# Altium PCB PWR_PCB_1.PcbDoc
Units mm, origin at the board's own origin, x right, y up, seen from the top; angles counter-clockwise.
Board outline 100 x 100 mm, 2 copper layers (Top Layer, Bottom Layer); 23 components, 8 nets, 46 pads, 0 vias.
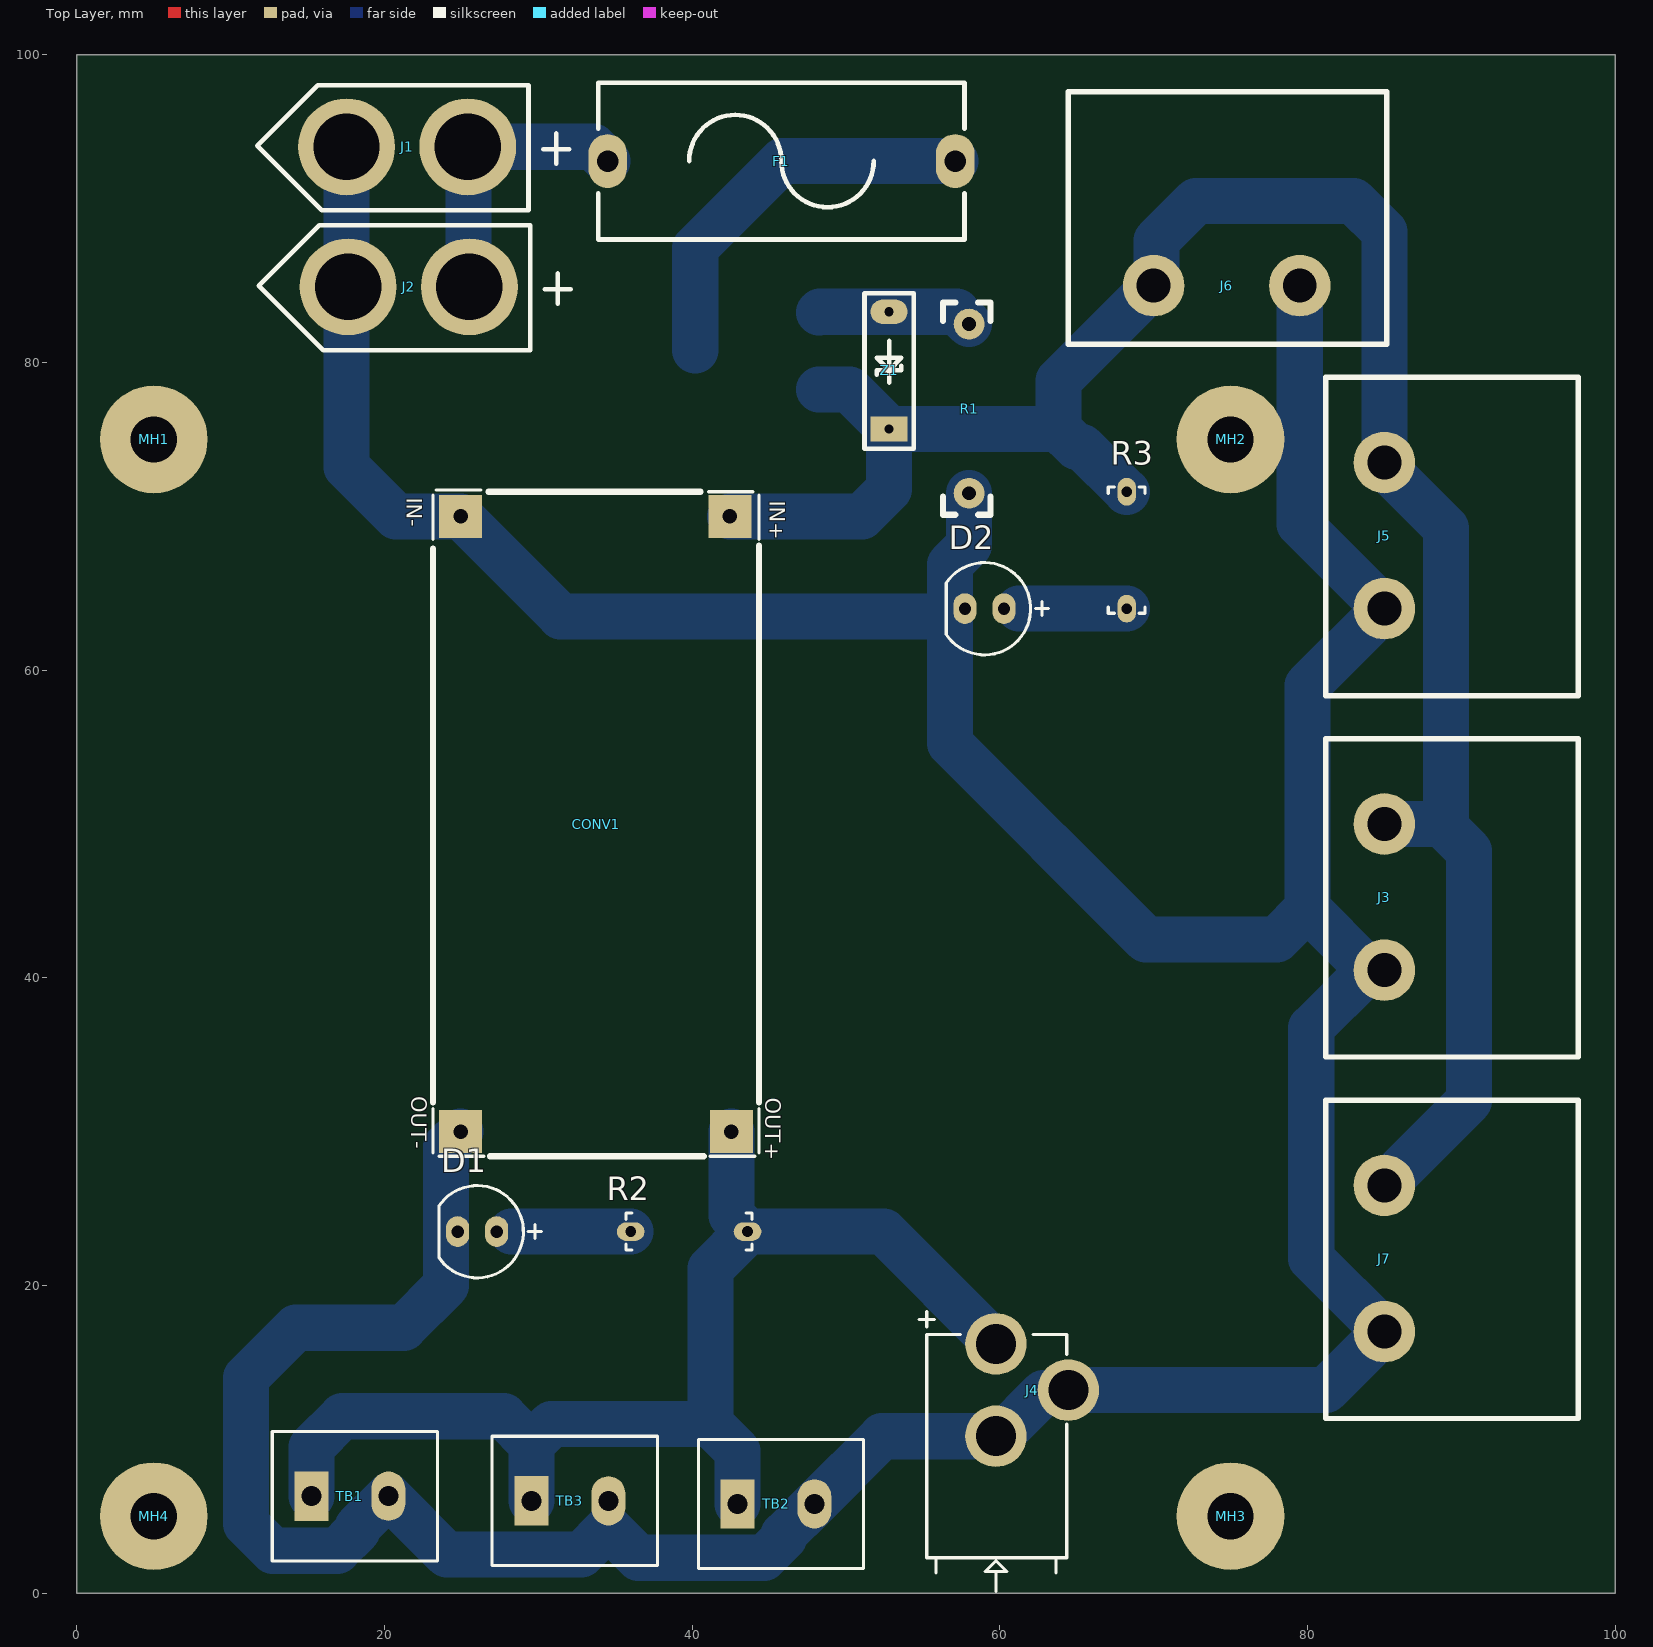
[diagram p0: Top Layer view]
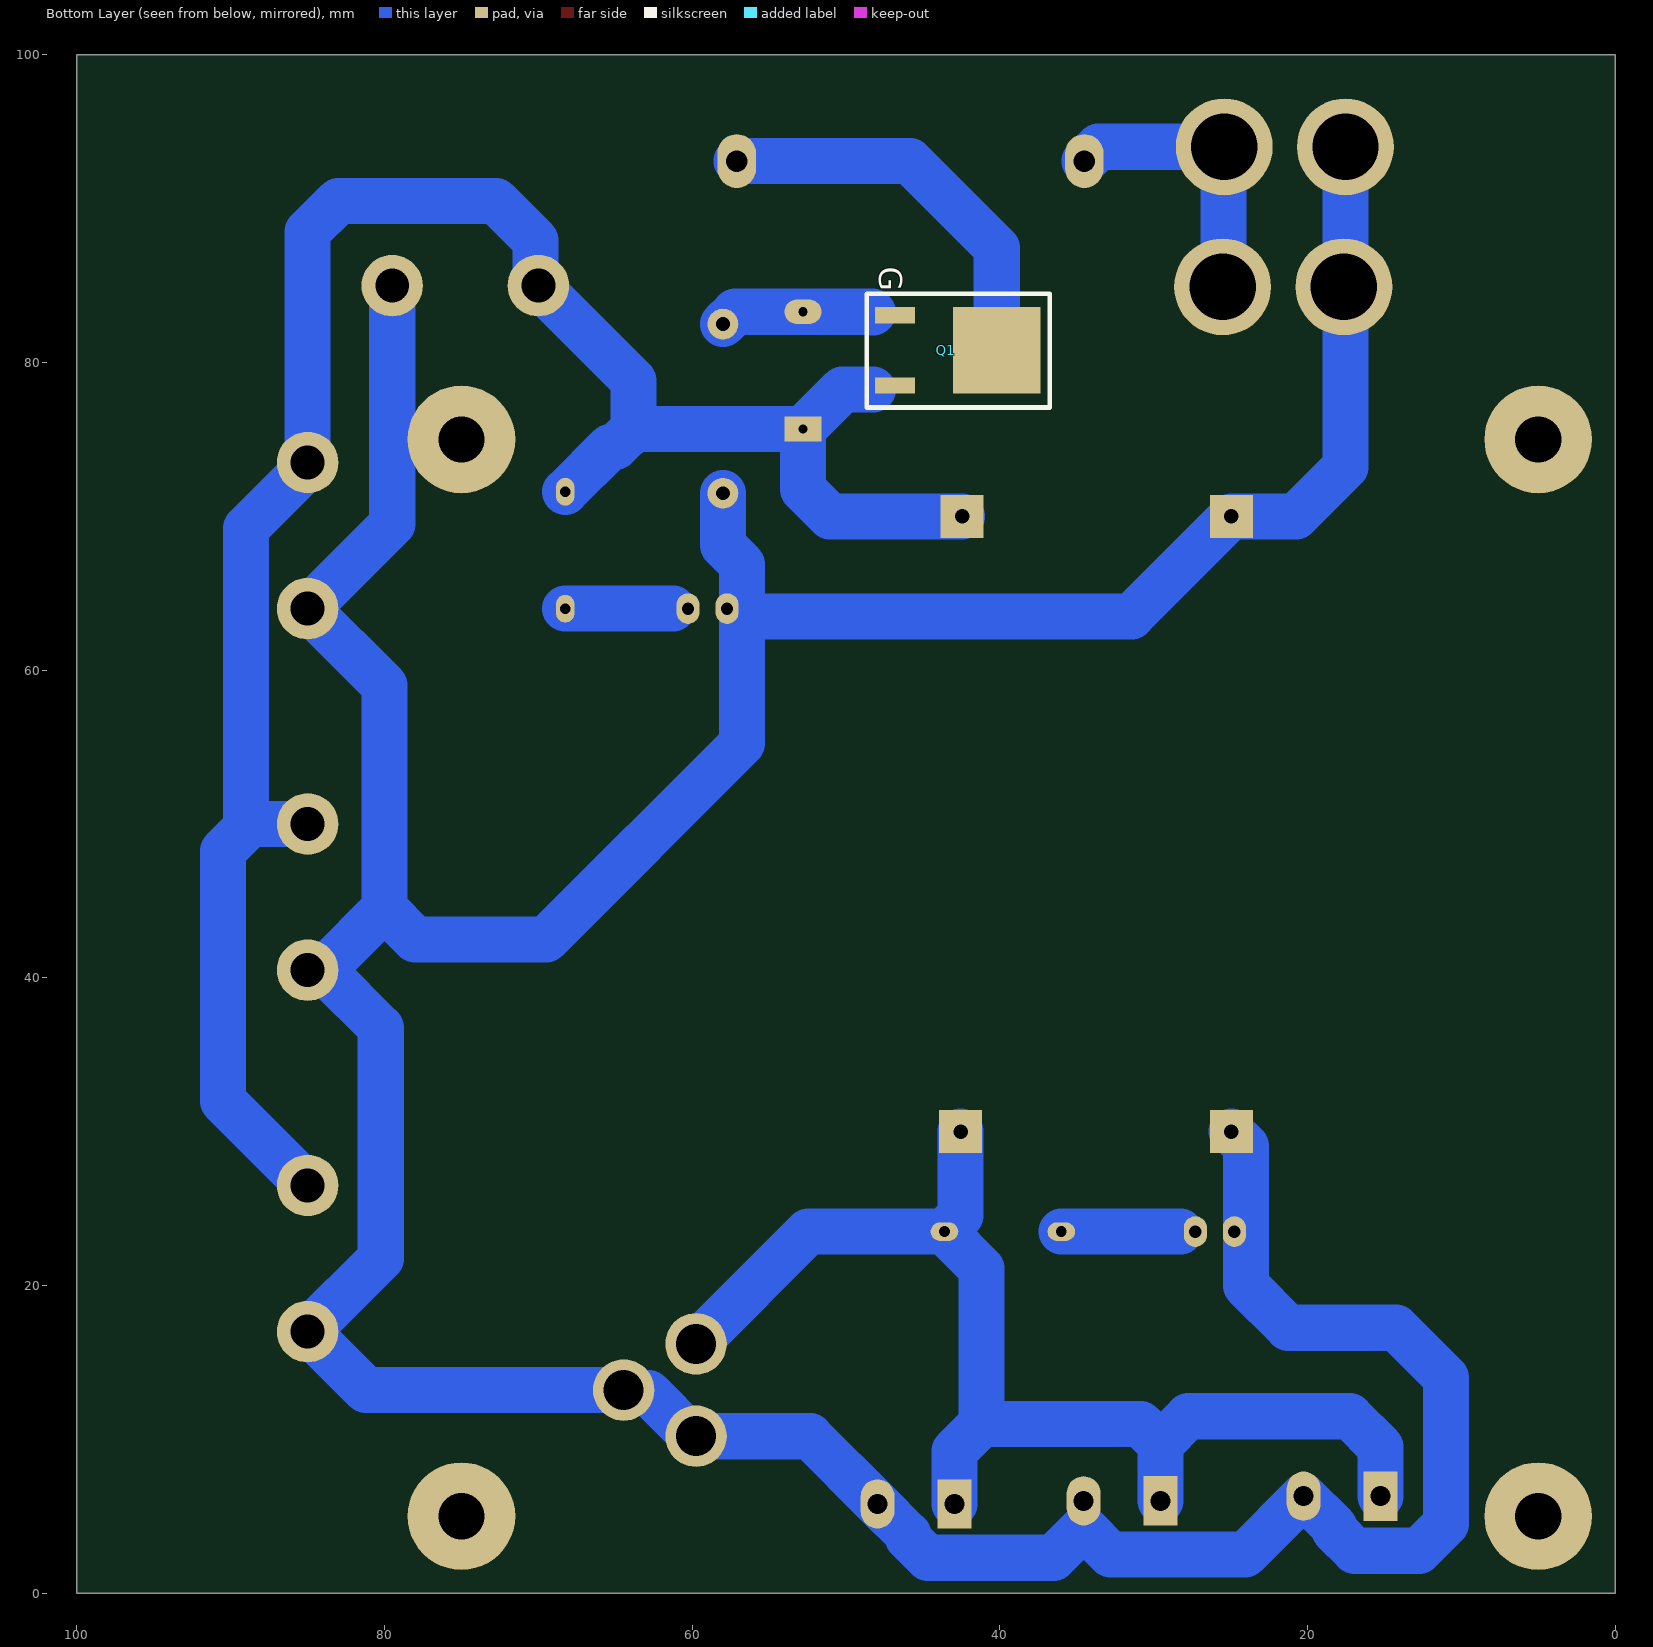
[diagram p1: Bottom Layer view, seen from below]
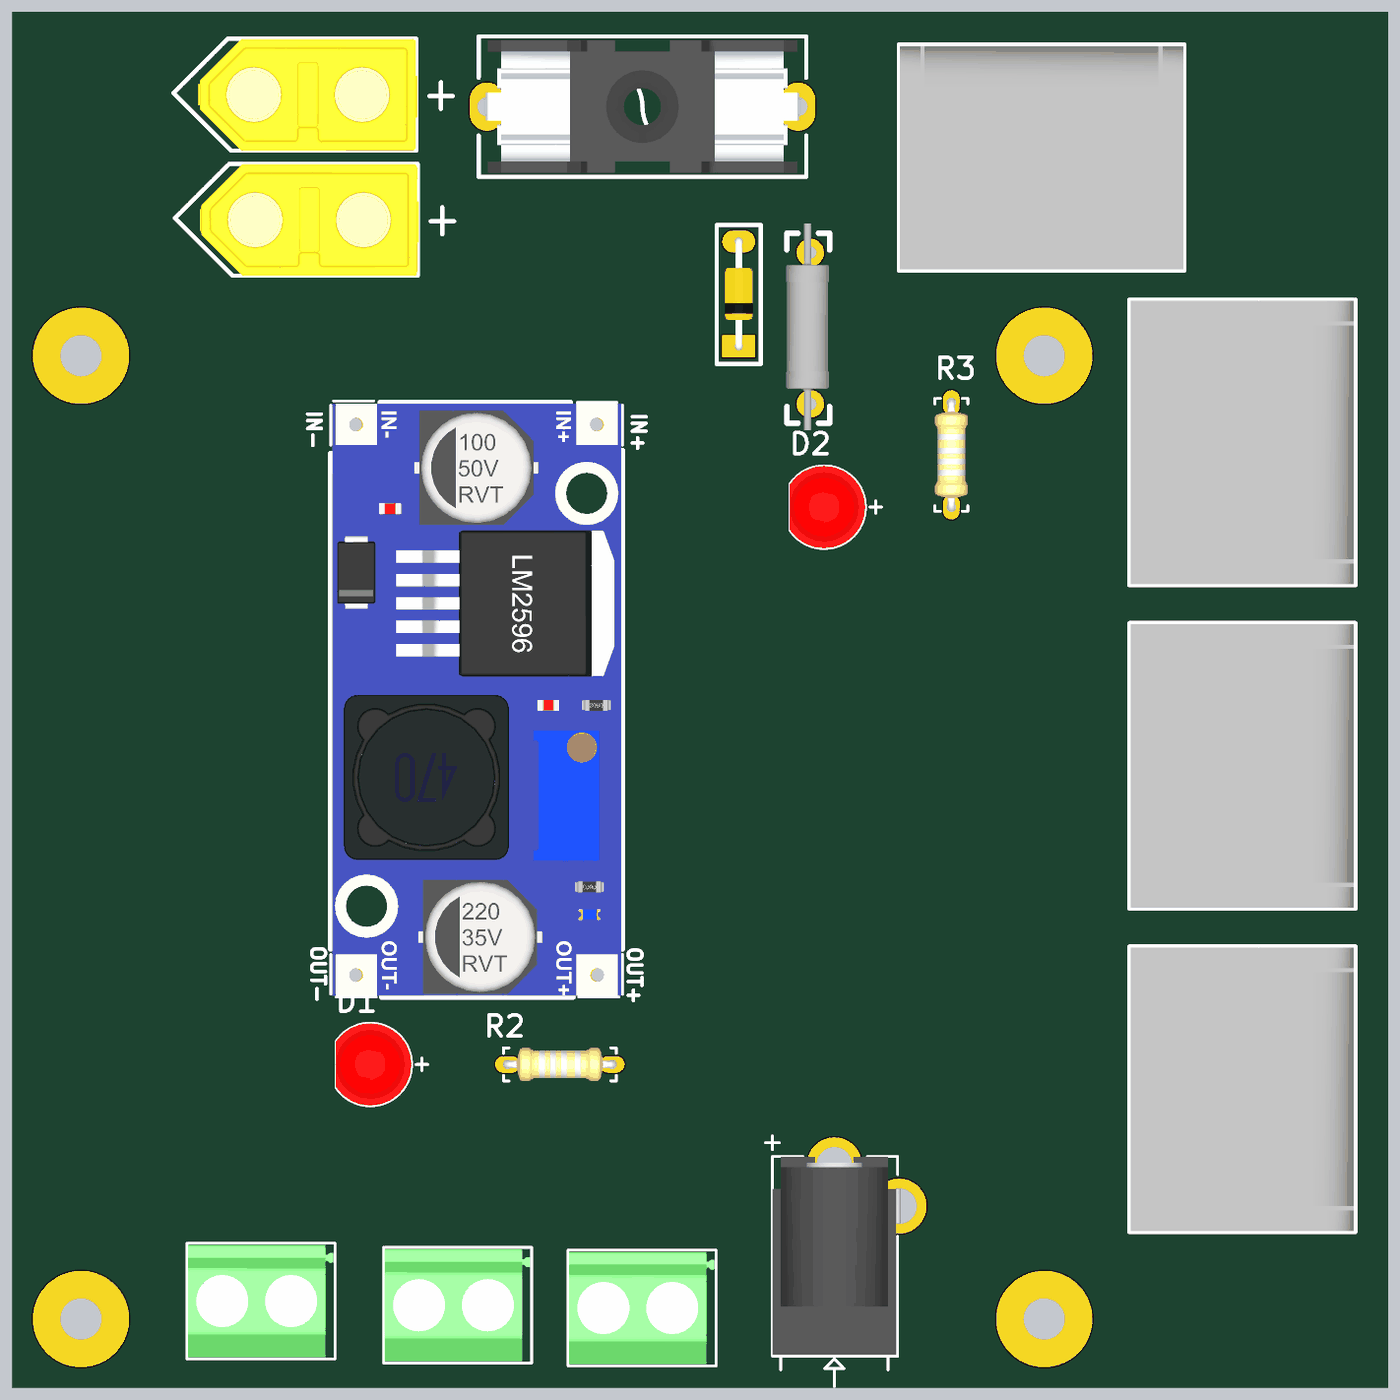
[diagram p2: 3D render of the assembled board from above, using the file's embedded part models]

## Layer stack, top to bottom
Top Solder: solder mask 0.0102, Solder Resist, Dk 3.5
Top Layer: signal copper 0.0356
Dielectric 1: dielectric 0.32, FR-4, Dk 4.8
Bottom Layer: signal copper 0.0356
Bottom Solder: solder mask 0.0102, Solder Resist, Dk 3.5

## Board outline
0,0 100,0 100,100 0,100

## Design rules (kind name [scope] priority, off if disabled: settings)
Clearance [All] p1: gap=0.5 ignorepadtopadclearanceinfootprint=FALSE
PolygonConnect [All] p1: connectstyle=Relief reliefconductorwidth=0.254 reliefentries=4 polygonreliefangle="90 Angle" airgapwidth=0.254
RoutingVias [All] p1: holewidth=0.711 width=1.27 viastyle="Through Hole" minholewidth=0.711 minwidth=1.27 maxholewidth=0.711 maxwidth=1.27
SolderMaskExpansion [All] p1: expansion=0.102 istentingtop=FALSE
Width [All] p1: maxlimit=4 minlimit=0.6 preferedwidth=1
30 further rules are at their usual default settings.

## Components (designator, comment, footprint, x,y, rotation, side; value= is the part's Value field where it differs from the comment)
CONV1 "LM2596  DC-DC Step Down" DC_STP_DWN 33.75,50 r270 top
D1 "Red" LED_TH_2.54mm 26.02,23.5 r180 top
D2 "Red" LED_TH_2.54mm 59,64 r180 top
F1 "Fuse Holder T5x20" FUSE 45.8,93.1 r0 top
J1 "XT-60" XT-60_FEM 21.5,94.1 r90 top
J2 "XT-60" XT-60_FEM 21.6,85 r90 top
J3 "Barrier TRM 1x2 9.5mm" BARRIER_9.5MM 85,50 r270 top
J4 "Barrel Power Jack" pwr_Jack 59.75,16.2 r180 top
J5 "Barrier TRM 1x2 9.5mm" BARRIER_9.5MM 85,73.5 r270 top
J6 "Barrier TRM 1x2 9.5mm" BARRIER_9.5MM 70,85 r0 top
J7 "Barrier TRM 1x2 9.5mm" BARRIER_9.5MM 85,26.5 r270 top
MH1 "MH_7.4MMC_3.2MMD" MH_7.4MMC_3.2MMD 5,75 r0 top
MH2 "MH_7.4MMC_3.2MMD" MH_7.4MMC_3.2MMD 75,75 r0 top
MH3 "MH_7.4MMC_3.2MMD" MH_7.4MMC_3.2MMD 75,5 r0 top
MH4 "MH_7.4MMC_3.2MMD" MH_7.4MMC_3.2MMD 5,5 r0 top
Q1 "AOD403" DPAK 46.825,83.075 r270 bottom
R1 "TH CFR-50 Resis" R_THT_CFR-50 58,77 r90 top
R2 "1k" R_THT_CFR-25 36,23.5 r0 top
R3 "1k" R_THT_CFR-25 68.25,64 r90 top
TB1 "TERM 1x2 5mm" TERMINAL_5MM 17.75,6.3 r90 top
TB2 "TERM 1x2 5mm" TERMINAL_5MM 45.45,5.8 r90 top
TB3 "TERM 1x2 5mm" TERMINAL_5MM 32.05,6 r90 top
Z1 "BZX55C9V1" DO-35 52.8,83.3 r270 top

## Footprints (in the part's own frame and the unit in brackets; to place one, negate y for a bottom-side part, rotate by r counter-clockwise, add the part's x,y. Pads: shape width x height; smd on the part's side, far side on the other; paste and mask are expansions set on the pad)
BARRIER_9.5MM [mm]
  round 4 hole 2.2: 1(0,0) 2(9.5,0)
  silkscreen extent -5.55,-3.8 15.15,12.6, body extent -5.5,-3.73 15.1,12.47, height 20.61
DC_STP_DWN [mm]
  rect 2.8x2.8 hole 0.95: 1(-20,8.7) 2(-20,-8.8) 3(20,8.8) 4(20,-8.8)
  silkscreen extent -21.72,-10.6 21.6,10.6, body extent -21.5,-10.5 21.5,10.5, height 13.16
DO-35 [mm]
  oval 1.6x2.4 hole 0.6: A(0,0)
  rect 1.6x2.4 hole 0.6: K(7.62,0)
  silkscreen extent -1.2,-1.6 8.9,1.6, body extent -0.26,-1 7.86,1.01, height 2.01
DPAK [mm]
  rect 5.632x5.7 smd: D(2.275,6.625)
  rect 1.06x2.6 smd: G(0,0) S(4.572,0)
  silkscreen extent -1.4,-1.83 6,10.07, body extent -0.97,-0.5 5.53,8.2, height 2.3
FUSE [mm]
  oval 2.5x3.5 hole 1.4: 1(-11.3,0) 2(11.3,0)
  silkscreen extent -11.9,-5.1 11.9,5.1, body extent -11.55,-4.8 11.55,4.8, height 11.5
LED_TH_2.54mm [mm]
  oval 1.5x2 hole 0.8: 1(-1.27,0) 2(1.27,0)
  silkscreen extent -4.17,-2.99 2.49,3.01, body extent -3,-3 2.5,3, height 8.96
MH_7.4MMC_3.2MMD [mm]
  round 7 hole 3: 1(0,0)
pwr_Jack [mm]
  round 4 hole 2.6: 1(0,0) 2(-4.7,3) 3(0,6)
  silkscreen extent -4.6,-2.1 5,16.1, body extent -4.8,-0.6 4.5,13.8, height 11.01
R_THT_CFR-25 [mm]
  oval 1.8x1.2 hole 0.7: 1(0,0) 2(7.6,0)
  silkscreen extent -0.3,-1.2 7.9,1.2, body extent -0.28,-1.2 7.89,1.2, height 1.9
R_THT_CFR-50 [mm]
  round 2 hole 0.9: 1(-5.5,0) 2(5.5,0)
  silkscreen extent -6.9,-1.4 6.9,1.7, body extent -7.4,-1.35 7.6,1.75, height 3.05
TERMINAL_5MM [mm]
  rect 3.2x2.2 hole 1.3: 1(0,2.5)
  oval 3.2x2.2 hole 1.3: 2(0,-2.5)
  silkscreen extent -4.2,-5.7 4.2,5.05, body extent -4.08,-5.58 4.07,4.98, height 10.01
XT-60_FEM [mm]
  round 6.3 hole 4.3: 1(-0.076,-3.912) 2(-0.076,3.962)
  silkscreen extent -4.19,-10.52 3.94,9.78, body extent -4.2,-7.96 3.93,7.98, height 15.39

## Part data
CONV1: library part "Buck Conv.", "Conv DC-DC 4.5V to 40V Inv/Step Down Single-Out 1.2V to 37V 3A 6-Pin(5+Tab) TO-263 Tube", Case/Package=TO-263, Manufacturer 1="Texas Instruments", Manufacturer Part Number 1=LM2596S-ADJ/NOPB, Max Input Voltage=40V, Max Operating Temperature=125°C, Max Output Current=3A, Max Output Voltage=37V, Min Input Voltage=4.5V, Min Operating Temperature=-40°C, Min Output Voltage=1.2V, Quiescent Current=5mA, Supplier Part Number 1=LM2596S-ADJ/NOPB-ND, Switching Frequency=173kHz, ComponentLink1Description=https://datasheet.ciiva.com/27056/2051160-27056491.pdf?src-supplier=Jameco, ComponentLink1URL=https://datasheet.ciiva.com/27056/2051160-27056491.pdf?src-supplier=Jameco, ComponentLink2Description=https://datasheet.ciiva.com/15112/getdatasheetpartid-55559-15112636.pdf?src-supplier=Verical, ComponentLink2URL=https://datasheet.ciiva.com/15112/getdatasheetpartid-55559-15112636.pdf?src-supplier=Verical, ComponentLink3Description=https://datasheet.ciiva.com/41457/001013814-da-01-en-ic-reg-buc-lm2596s-adj-nopb-to-263-5-tid-41457756.pdf?src-supplier=Conrad, ComponentLink3URL=https://datasheet.ciiva.com/41457/001013814-da-01-en-ic-reg-buc-lm2596s-adj-nopb-to-263-5-tid-41457756.pdf?src-supplier=Conrad, ComponentLink4Description=https://datasheet.ciiva.com/6596/lm2596-6596342.pdf?src-supplier=Digi-Key, ComponentLink4URL=https://datasheet.ciiva.com/6596/lm2596-6596342.pdf?src-supplier=Digi-Key, ComponentLink5Description=https://datasheet.ciiva.com/22669/1874590-22669464.pdf?src-supplier=Element14, ComponentLink5URL=https://datasheet.ciiva.com/22669/1874590-22669464.pdf?src-supplier=Element14, ComponentLink6Description=https://datasheet.ciiva.com/14150/jqlm2596x-xx-e-14150653.pdf?src-supplier=Distrelec, ComponentLink6URL=https://datasheet.ciiva.com/14150/jqlm2596x-xx-e-14150653.pdf?src-supplier=Distrelec, ComponentLink7Description=https://octopart.com/click/track?ai=10049&ct=datasheets&sig=08a4c86&at=physicalpart&sid=370&ppid=24812941&hlid=29972682&src-supplier=TI+store, ComponentLink7URL=https://octopart.com/click/track?ai=10049&ct=datasheets&sig=08a4c86&at=physicalpart&sid=370&ppid=24812941&hlid=29972682&src-supplier=TI+store, ComponentLink8Description=http://datasheet.octopart.com/LM2596S-ADJ-NOPB-Texas-Instruments-datasheet-34438175.pdf?src-supplier=TME, ComponentLink8URL=http://datasheet.octopart.com/LM2596S-ADJ-NOPB-Texas-Instruments-datasheet-34438175.pdf?src-supplier=TME, ComponentLink9Description=http://datasheet.octopart.com/LM2596S-ADJ/NOPB-Texas-Instruments-datasheet-10621667.pdf?src-supplier=Verical, ComponentLink9URL=http://datasheet.octopart.com/LM2596S-ADJ/NOPB-Texas-Instruments-datasheet-10621667.pdf?src-supplier=Verical, ComponentLink10Description=http://datasheet.octopart.com/LM2596S-ADJ-NOPB-Texas-Instruments-datasheet-14775467.pdf?src-supplier=TI+store, ComponentLink10URL=http://datasheet.octopart.com/LM2596S-ADJ-NOPB-Texas-Instruments-datasheet-14775467.pdf?src-supplier=TI+store, ComponentLink11Description=http://sigma.octopart.com/49250911/technical_drawing/Texas-Instruments-LM2596S-ADJ-NOPB.pdf?src-supplier=TI+store, ComponentLink11URL=http://sigma.octopart.com/49250911/technical_drawing/Texas-Instruments-LM2596S-ADJ-NOPB.pdf?src-supplier=TI+store, ComponentLink12Description=http://datasheet.octopart.com/LM2596S-ADJ/NOPB-National-Semiconductor-datasheet-6038.pdf?src-supplier=Future+Electronics, ComponentLink12URL=http://datasheet.octopart.com/LM2596S-ADJ/NOPB-National-Semiconductor-datasheet-6038.pdf?src-supplier=Future+Electronics, ComponentLink13Description=http://datasheet.octopart.com/LM2596S-ADJ-NOPB-Texas-Instruments-datasheet-21076667.pdf?src-supplier=Newark, ComponentLink13URL=http://datasheet.octopart.com/LM2596S-ADJ-NOPB-Texas-Instruments-datasheet-21076667.pdf?src-supplier=Newark, ComponentLink14Description=http://datasheet.octopart.com/LM2596S-ADJ-NOPB-Texas-Instruments-datasheet-9136.pdf?src-supplier=Element14, ComponentLink14URL=http://datasheet.octopart.com/LM2596S-ADJ-NOPB-Texas-Instruments-datasheet-9136.pdf?src-supplier=Element14, ComponentLink15Description=http://datasheet.octopart.com/LM2596S-ADJ-NOPB-Texas-Instruments-datasheet-65712979.pdf?src-supplier=Newark, ComponentLink15URL=http://datasheet.octopart.com/LM2596S-ADJ-NOPB-Texas-Instruments-datasheet-65712979.pdf?src-supplier=Newark, ComponentLink16Description=http://datasheet.octopart.com/LM2596S-ADJ-NOPB-Texas-Instruments-datasheet-8528656.pdf?src-supplier=Element14, ComponentLink16URL=http://datasheet.octopart.com/LM2596S-ADJ-NOPB-Texas-Instruments-datasheet-8528656.pdf?src-supplier=Element14, ComponentLink17Description=http://datasheet.octopart.com/LM2596S-ADJ-NOPB-Texas-Instruments-datasheet-10845692.pdf?src-supplier=Element14, ComponentLink17URL=http://datasheet.octopart.com/LM2596S-ADJ-NOPB-Texas-Instruments-datasheet-10845692.pdf?src-supplier=Element14, ComponentLink18Description=http://datasheet.octopart.com/LM2596S-ADJ-NOPB-Texas-Instruments-datasheet-7596510.pdf?src-supplier=Jameco, ComponentLink18URL=http://datasheet.octopart.com/LM2596S-ADJ-NOPB-Texas-Instruments-datasheet-7596510.pdf?src-supplier=Jameco, ComponentLink19Description=http://datasheet.octopart.com/LM2596S-ADJ-NOPB-Texas-Instruments-datasheet-62342754.pdf?src-supplier=TME, ComponentLink19URL=http://datasheet.octopart.com/LM2596S-ADJ-NOPB-Texas-Instruments-datasheet-62342754.pdf?src-supplier=TME, ComponentLink20Description=http://datasheet.octopart.com/LM2596S-ADJ-NOPB-Texas-Instruments-datasheet-17726397.pdf?src-supplier=Upverter, ComponentLink20URL=http://datasheet.octopart.com/LM2596S-ADJ-NOPB-Texas-Instruments-datasheet-17726397.pdf?src-supplier=Upverter, ComponentLink21Description=http://datasheet.octopart.com/LM2596S-ADJ/NOPB-National-Semiconductor-datasheet-9599829.pdf?src-supplier=Allied+Electronics, ComponentLink21URL=http://datasheet.octopart.com/LM2596S-ADJ/NOPB-National-Semiconductor-datasheet-9599829.pdf?src-supplier=Allied+Electronics, Contact Plating=Tin, Efficiency=73%, Height=4.57mm, Lead Free="Contains Lead", Length=10.16mm, Mount="Surface Mount", Number of Outputs=1, Number of Pins=5, Operating Supply Voltage=40V, Output Current=3A, Output Type=Adjustable, Output Voltage=37V, Parameter Name 1=Rail/Tube, Pricing 1="1=5.72000, 10=5.14100, 25=4.86000, 100=3.99600, 250=3.58560, 500=3.45600, 1000=2.87280, 2500=2.76480, 5000=2.67840 (USD)", Radiation Hardening=No, REACH SVHC="No SVHC", Stock 1=4513, Supplier 1=Digi-Key, Weight=0.056128oz, Width=8.64mm
D1 D2: library part "TH Red LED 5mm", "LED RED DIFF 5MM OVAL T/H", Case/Package=Radial, Forward Voltage=2.1V, Manufacturer 1="Marktech Optoelectronics", Manufacturer Part Number 1=MT5470E-UR, Package Quantity=5000, Supplier Part Number 1=1125-1193-ND, Test Current=20mA, Color=Red, ComponentLink1Description=https://datasheet.ciiva.com/18614/mt5470e-ur-18614243.pdf?src-supplier=Digi-Key, ComponentLink1URL=https://datasheet.ciiva.com/18614/mt5470e-ur-18614243.pdf?src-supplier=Digi-Key, Dominant Wavelength=625nm, Height=7.8mm, Lens Color=Red, Lens Style=Diffused,Tinted, Lens Transparency=Diffused, Luminous Intensity=2300mcd, Mount="Through Hole", Parameter Name 1=Bulk, Pricing 1="1=0.61000, 10=0.44100, 100=0.28800, 500=0.20700, 1000=0.16200, 2500=0.14850, 5000=0.13500, 10000=0.12600, 25000=0.12150 (USD)", RoHS=Yes, Stock 1=7117, Supplier 1=Digi-Key, Viewing Angle=70°
F1: library part FUSE_T5x20
J1 J2: library part "XT-60 Power Female Con.", "XT60 CONNECTORS MALE/FEMALE PAIR", Manufacturer 1=SparkFun, Manufacturer Part Number 1=PRT-10474, Supplier Part Number 1=1568-1816-ND, ComponentLink1Description=https://cdn.sparkfun.com/datasheets/Prototyping/xt60.pdf?src-supplier=Digi-Key, ComponentLink1URL=https://cdn.sparkfun.com/datasheets/Prototyping/xt60.pdf?src-supplier=Digi-Key, Pricing 1="1=1.50000 (USD)", RoHS=No, Stock 1=3168, Supplier 1=Digi-Key
J3 J5 J6 J7: library part "Barrier BLK", "CONN BARRIER STRIP 2CIRC 0.374\"", Color=Black, Current Rating=30A, Flammability Rating="UL94 V-0", Manufacturer 1="On-Shore Technology", Manufacturer Part Number 1=OSTYK44102030, Max Operating Temperature=105°C, Min Operating Temperature=-40°C, Supplier Part Number 1=ED2971-ND, Voltage Rating=300V, ComponentLink1Description=https://datasheet.ciiva.com/778/ostyk441xx030-778584.pdf?src-supplier=Digi-Key, ComponentLink1URL=https://datasheet.ciiva.com/778/ostyk441xx030-778584.pdf?src-supplier=Digi-Key, Insulation Material=Nylon, Mount="Through Hole", Number of Circuits=2, Number of Rows=1, Number of Wire Entries=2, Parameter Name 1=Bulk, Pitch=0.374inch, Pricing 1="1=1.22000, 10=0.76100, 25=0.65160, 50=0.58560, 100=0.57340, 250=0.48800, 500=0.46360, 1000=0.41480, 5000=0.32452 (USD)", RoHS=Yes, Stock 1=3505, Supplier 1=Digi-Key, Wire Gauge (Max)=22AWG, Wire Gauge (Min)=10AWG
J4: library part Con-Jack, "DC-Power Socket 12V 5A 2, 1mm Solder Eyel", Current Rating=5A, Manufacturer 1=Cliff, Manufacturer Part Number 1=FC68148, Supplier Part Number 1=735742, ComponentLink1Description=http://www.farnell.com/datasheets/317160.pdf?src-supplier=Farnell, ComponentLink1URL=http://www.farnell.com/datasheets/317160.pdf?src-supplier=Farnell, ComponentLink2Description=http://www.rapidonline.com/pdf/735742_da_en_01.pdf?src-supplier=Rapid+Electronics, ComponentLink2URL=http://www.rapidonline.com/pdf/735742_da_en_01.pdf?src-supplier=Rapid+Electronics, ComponentLink3Description=http://www.produktinfo.conrad.com/datenblaetter/725000-749999/735742-da-01-en-DC_BUCHSE_2_1MM_FC68148.pdf?src-supplier=Conrad, ComponentLink3URL=http://www.produktinfo.conrad.com/datenblaetter/725000-749999/735742-da-01-en-DC_BUCHSE_2_1MM_FC68148.pdf?src-supplier=Conrad, Connector Type=Socket, Height=0.25inch, Inside Diameter=6.3mm, Length=5inch, Orientation="Right Angle", Parameter Name 1=Bulk, RoHS=Yes, Supplier 1=Conrad, Weight=0.1lb, Width=3inch
MH1 MH2 MH3 MH4: library part "Mounting Hole 3mm", "Mounting Hole, 7.4mm diameter, 3.2mm drill."
Q1: "MOSFET Transistor P-Channel 30V 15A 3.5V @ 250uA 6mΩ @ 20A,20V 2.5W TO-252-2(DPAK)"
R1: "General Type Carbon Film Resistor 330Ohm 1/2W 5% Axial Bulk", Case/Package=Axial, Manufacturer 1=Yageo, Manufacturer Part Number 1=CFR-50JB-52-330R, Max Operating Temperature=155°C, Max Power Dissipation=500mW, Min Operating Temperature=-55°C, Package Quantity=200, Resistance=330R, Resistor Type="Carbon Film", Temperature Coefficient=500ppm/°C, Tolerance=5%, ComponentLink1Description=http://www.yageo.com/documents/recent/Yageo%20LR_CFR_2013.pdf?src-supplier=Digi-Key, ComponentLink1URL=http://www.yageo.com/documents/recent/Yageo%20LR_CFR_2013.pdf?src-supplier=Digi-Key, Length=0.354inch, Number of Terminations=2, Packaging=Bulk, Pricing 1="1=0.11000, 10=0.09800, 25=0.06800, 50=0.05300, 100=0.03780, 250=0.02948, 500=0.02344, 1000=0.01663, 5000=0.01285 (USD)", RoHS=Yes, Stock 1=1637, Supplier 1=Digi-Key
R2 R3: library part "TH CFR-25 Resis", "CFR Series 0.25 W 1 KOhm ±5 % -350 to 500 ppm/°C Carbon Film Resistor", Case/Package=Axial, Manufacturer 1=Yageo, Manufacturer Part Number 1=CFR-25JB-52-1K, Max Operating Temperature=155°C, Max Power Dissipation=250mW, Min Operating Temperature=-55°C, Package Quantity=200, Resistance=1kR, Resistor Type="Carbon Film", Supplier Part Number 1=1.0KQBK-ND, Temperature Coefficient=500ppm/°C, Tolerance=5%, ComponentLink1Description=http://www.yageo.com/NewPortal/yageodocoutput?fileName=/pdf/throughhole/Yageo_LR_CFR_2013.pdf&src-supplier=Digi-Key, ComponentLink1URL=http://www.yageo.com/NewPortal/yageodocoutput?fileName=/pdf/throughhole/Yageo_LR_CFR_2013.pdf&src-supplier=Digi-Key, ComponentLink2Description=http://www.yageo.com/documents/recent/General%20Type_CFR.pdf?src-supplier=Future+Electronics, ComponentLink2URL=http://www.yageo.com/documents/recent/General%20Type_CFR.pdf?src-supplier=Future+Electronics, Lead Free="Lead Free", Length=0.248inch, Number of Terminations=2, Parameter Name 1=Bulk, Power Rating=250mW, Pricing 1="1=0.10000, 25=0.04680, 50=0.03640, 100=0.02600, 250=0.02028, 500=0.01612, 750=0.01379, 1000=0.01144, 2000=0.00988 (USD)", RoHS=Yes, Stock 1=194074, Supplier 1=Digi-Key
TB1 TB2 TB3: library part "Terminal BLK Green", "PHOENIX CONTACT         MKDSN 1,5/ 2             Wire-To-Board Terminal Block, 5 mm, 2 Ways, 26 AWG, 16 AWG, 1.5 mm, Screw", Color=Green, Current=10A, Current Rating=13.5A, Flammability Rating="UL94 V-0", Manufacturer 1="Phoenix Contact", Manufacturer Part Number 1=1729018, Max Supply Voltage=250V, Package Quantity=50, Supplier Part Number 1=651-1729018, Voltage=300V, Voltage Rating=400V, Approvals=UL,CSA,cULus,CB, ComponentLink1Description=https://datasheet.ciiva.com/16071/1729018-16071814.pdf?src-supplier=Onlinecomponents.com, ComponentLink1URL=https://datasheet.ciiva.com/16071/1729018-16071814.pdf?src-supplier=Onlinecomponents.com, ComponentLink2Description=https://datasheet.ciiva.com/832/1729018-832055.pdf?src-supplier=Digi-Key, ComponentLink2URL=https://datasheet.ciiva.com/832/1729018-832055.pdf?src-supplier=Digi-Key, ComponentLink3Description=https://datasheet.ciiva.com/15169/getdatasheetpartid-177860-15169643.pdf?src-supplier=Verical, ComponentLink3URL=https://datasheet.ciiva.com/15169/getdatasheetpartid-177860-15169643.pdf?src-supplier=Verical, ComponentLink4Description=https://datasheet.ciiva.com/14607/70054375-14607356.pdf?src-supplier=Allied+Electronics, ComponentLink4URL=https://datasheet.ciiva.com/14607/70054375-14607356.pdf?src-supplier=Allied+Electronics, ComponentLink5Description=https://datasheet.ciiva.com/33105/1729018-33105978.pdf?src-supplier=Today+Components, ComponentLink5URL=https://datasheet.ciiva.com/33105/1729018-33105978.pdf?src-supplier=Today+Components, Connector Type=Screw, Contact Material=Tin, Depth=8.1mm, Gender=Male, Height=13.5mm, Housing Color=Green, Housing Material=Polyamide, Insulation Material=Nylon, Lead Free="Lead Free", Length=8.1mm, Material=Polyamide, Max Current Rating=13.5A, Mount="Through Hole", Number of Circuits=2, Number of Contacts=2, Number of Levels=1, Number of Pins=2, Number of Poles=2, Number of Positions=2, Number of Positions Per Level=2, Number of Rows=1, Orientation=Straight, Parameter Name 1=Bulk, Pitch=5mm, Pricing 1="1=1.10000, 10=1.05000, 50=1.01000, 100=0.97400, 250=0.91000, 500=0.83800 (USD)", Radiation Hardening=No, REACH SVHC=Unknown, RoHS=Yes, Stock 1=6371, Stripping Length=6mm, Supplier 1=Mouser, Termination=Screw, Weight=0.06949oz, Width=13.5mm, Wire Gauge (Max)=26AWG, Wire Gauge (Min)=26AWG, Wire/Cable Gauge=26AWG
Z1: library part Zener_DO-35, "TH Zener Diode DO-35"

## Nets (pads, with @x,y where several pads share a name; then routed paths per layer and width w, separated by ;. In a path a pad name is that pad's centre, name@x,y a point inside that pad or via, vN(x,y) a via of type N, cw(c..) or ccw(c..) an arc to the next point about the centre after c; other vN are vias at no path point)
+5: CONV1.3 J4.1 R2.2 TB1.1 TB2.1 TB3.1 | length 80.5
  Bottom Layer w3: TB1.1 15.25,9.5 17.25,11.5 27.75,11.5 29.55,9.7 ; TB3.1 29.55,9.7 ; CONV1.3 42.55,24.55 R2.2 ; TB2.1 42.95,9.243 41.193,11 ; J4.1 52.45,23.5 R2.2 ; 29.55,9.7 30.85,11 41.193,11 ; 41.193,11 41.193,21.093 R2.2
+12: CONV1.1 J3.1 J5.1 J6.1 J7.1 Q1.S R3.2 Z1.K | length 139.9
  Bottom Layer w3: CONV1.1 51.043,70 52.8,71.757 Z1.K ; 48.25,78.25 50.23,78.25 Z1.K ; R3.2 65.35,74.5 65,74.5 63.82,75.68 ; J7.1 90.5,32 90.5,48.243 88.743,50 ; J3.1 88.743,50 ; Z1.K 63.82,75.68 ; 63.82,75.68 63.82,78.82 J6.1 70.191,85.191 70.191,87.941 72.75,90.5 83,90.5 85,88.5 J5.1 85,73.229 89,69.229 89,50.257 88.743,50
GND: CONV1.2 CONV1.4 D1.2 D2.2 J1.2 J2.2 J3.2 J4.2 J4.3 J5.2 J6.2 J7.2 R1.1 TB1.2 TB2.2 TB3.2 | length 310.7
  Bottom Layer w3: J1.2 17.538,73.212 20.75,70 CONV1.2 31.45,63.5 56.75,63.5 ; CONV1.4 24,29.05 24,20 21.25,17.25 14.25,17.25 11,14 11,4.507 12.757,2.75 16.928,2.75 18.25,4.072 18.25,4.3 TB1.2 24.05,2.5 32.793,2.5 34.55,4.257 36.507,2.3 44.678,2.3 45.95,3.572 45.95,3.8 TB2.2 52.35,10.2 J4.3 60.021,10.2 62.829,13.009 64.259,13.009 J4.2 81.2,13.2 J7.2 80.25,21.75 80.25,36.75 83.809,40.309 84.809,40.309 J3.2 84.809,40.691 83.809,40.691 80,44.5 ; R1.1 58,68.125 56.75,66.875 56.75,63.5 ; J6.2 79.5,69.5 J5.2 80,59 80,44.5 ; 56.75,63.5 56.75,55.25 69.5,42.5 78,42.5 80,44.5
NetD1_1: D1.1 R2.1 | length 7.7
  Bottom Layer w3: 28.25,23.5 R2.1
NetD2_1: D2.1 R3.1 | length 7
  Bottom Layer w3: 61.25,64 R3.1
NetF1_2: F1.2 Q1.D | length 25.9
  Bottom Layer w3: Q1.D 40.2,87.45 45.85,93.1 F1.2
NetQ1_G: Q1.G R1.2 Z1.A | length 10.1
  Bottom Layer w3: 48.25,83.25 48.3,83.3 Z1.A 57.2,83.3 R1.2
VIN: F1.1 J1.1 J2.1 | length 18.6
  Bottom Layer w3: J2.1 25.462,84.974 25.462,93.974 J1.1 33.576,94.024 F1.1
pads on no net: MH1.1 MH2.1 MH3.1 MH4.1

## Text inside footprints (layer, text, board x,y; h text height)
CONV1: Top Overlay "OUT+" at 44.75,32.2 h1 r270; Top Overlay "IN+" at 45.05,71 h1 r270; Top Overlay "IN-" at 21.45,71.2 h1 r270; Top Overlay "OUT-" at 21.75,32.3 h1 r270
Q1: Bottom Overlay "G" at 47.85,86.225 h1.5 r90